# EAGLE board scanner_ps_nameco (EAGLE 5.11)
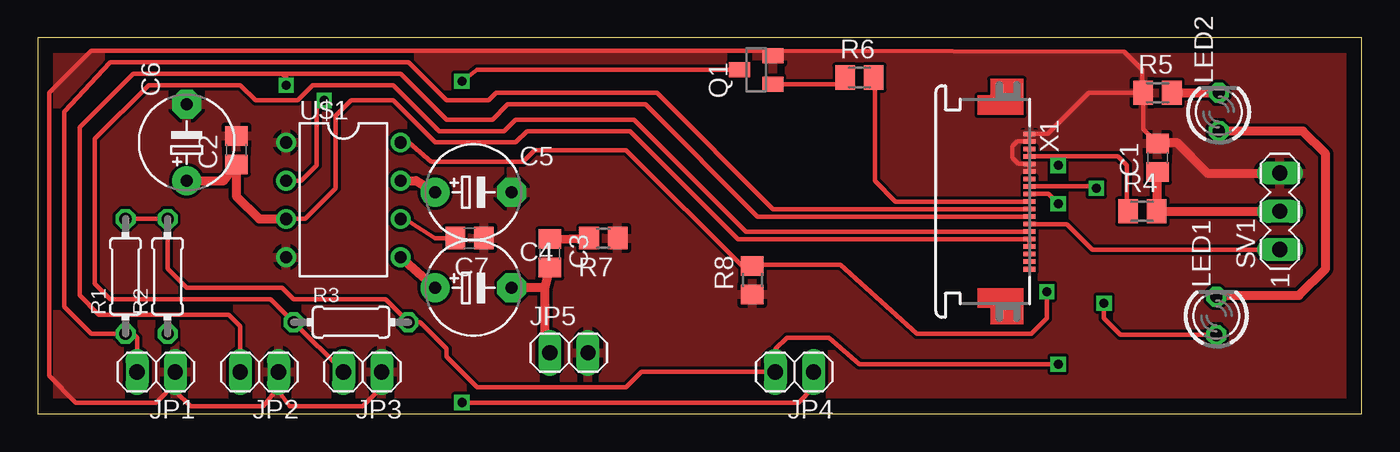
[diagram p0: board, top side]
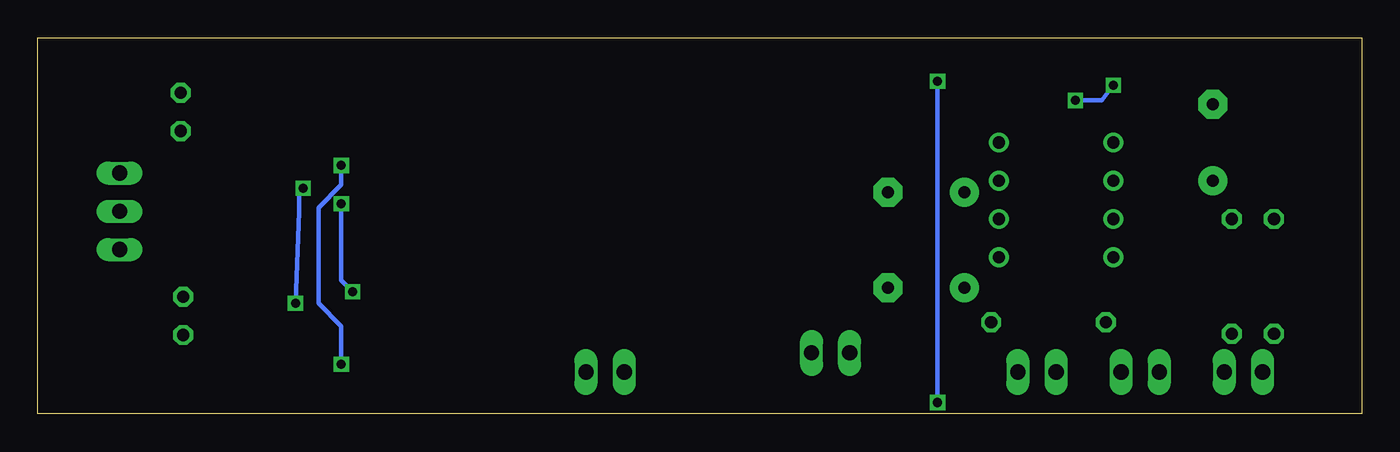
[diagram p1: board, bottom side, seen from below]

Size 88 x 25 mm. Coordinates in mm from the lower left corner, seen from the top.
Outline: 0,0 88,0 88,25 0,25 0,0
Copper layers (1*16): Top 0.035mm / dielectric 1.5mm / Bottom 0.035mm
Design rules "default": minimum track width 10mil, minimum drill 24mil, track to track 8mil, track to pad 8mil, pad to pad 8mil, via to via 8mil, smd to smd 8mil, copper to edge 40mil, drill to drill 8mil, minimum pad ring 10mil, minimum via ring 8mil, stop-mask expansion 4mil, vias tented up to drill 0mil, thermal gap 10mil

## Footprints (pad centres in the part's own frame; a part is rotated, then mirrored left to right if it is on the bottom)
C0805 = smd 1.3 x 1.5: 1 -0.95,0; 2 0.95,0
E5-6 = drill 0.813 pad 1.905 round: + -2.54,0 | drill 0.813 pad 1.905 octagon: - 2.54,0
1X02 = drill 1.016 long: 1 -1.27,0; 2 1.27,0
LED3MM = drill 0.813 octagon: A -1.27,0; K 1.27,0
SOT23 = smd 1 x 1.4: 1 -0.95,-1.1; 2 0.95,-1.1; 3 0,1.1
0204/7 = drill 0.813 octagon: 1 -3.81,0; 2 3.81,0
M0805 = smd 1.3 x 1.6: 1 -0.95,0; 2 0.95,0
R0805 = smd 1.3 x 1.5: 1 -0.95,0; 2 0.95,0
MA03-1 = drill 1.016 long: 1 -2.54,0; 2 0,0; 3 2.54,0
DIL08 = drill 0.813 pad 1.27 round: 1 -3.81,-3.81; 2 -1.27,-3.81; 3 1.27,-3.81; 4 3.81,-3.81; 5 3.81,3.81; 6 1.27,3.81; 7 -1.27,3.81; 8 -3.81,3.81
52746-19 = smd 0.3 x 0.8: 1 -4.5,0.6; 2 -4,0.6; 3 -3.5,0.6; 4 -3,0.6; 5 -2.5,0.6; 6 -2,0.6; 7 -1.5,0.6; 8 -1,0.6; 9 -0.5,0.6; 10 0,0.6; 11 0.5,0.6; 12 1,0.6; 13 1.5,0.6; 14 2,0.6; 15 2.5,0.6; 16 3,0.6; 17 3.5,0.6; 18 4,0.6; 19 4.5,0.6

## Placement (x,y rotation side)
C1  0.47µ  [C0805]  74.42,17.02 90 top
C2  100n  [C0805]  13.21,17.53 90 top
C3  100n  [C0805]  34.04,10.67 270 top
C4  470µ  [E5-6]  28.96,8.38 0 top
C5  100µ  [E5-6]  28.96,14.73 0 top
C6  220µ  [E5-6]  9.91,18.03 90 top
C7  22n  [C0805]  28.7,11.68 180 top
JP1  key1  [1X02]  7.87,2.79 180 top
JP2  key2  [1X02]  14.73,2.79 180 top
JP3  trigger  [1X02]  21.59,2.79 180 top
JP4  Laserdiode  [1X02]  50.29,2.79 180 top
JP5  speaker  [1X02]  35.31,4.06 0 top
LED1  YELLOW  [LED3MM]  78.33,6.52 90 top
LED2  RED  [LED3MM]  78.49,20.06 90 top
Q1  BSS123  [SOT23]  47.75,22.86 90 top
R1  10k  [0204/7]  5.84,9.14 90 top
R2  10k  [0204/7]  8.64,9.14 90 top
R3  10k  [0204/7]  20.83,6.1 0 top
R4  100  [M0805]  73.41,13.46 0 top
R5  120  [M0805]  74.42,21.34 0 top
R6  100  [M0805]  54.61,22.35 0 top
R7  4k7  [R0805]  37.59,11.68 180 top
R8  10k  [R0805]  47.5,8.89 90 top
SV1  TSOP_IR_REC  [MA03-1]  82.55,13.46 90 top
U$1  TDA7233  [DIL08]  20.32,14.22 270 top
X1  52746-19  [52746-19]  65.31,14.11 270 top

## Library data of the parts
C1-C7 R1-R8 = rcl
JP1-JP5 = pinhead
LED1 LED2 = led
Q1 = transistor-small-signal
SV1 = con-lstb
U$1 = Labor
X1 = con-molex

## Nets
GND: C1.2 C2.2 C5.- C6.- C7.1 JP1.1 JP2.1 JP3.1 JP5.2 Q1.2 R5.1 R7.1 R8.1 SV1.3 U$1.1 U$1.4 X1.1 X1.2 X1.5 X1.6
N$1: LED1.K LED2.A
N$2: LED2.K R5.2
N$3: C1.1 R4.2 SV1.2
N$4: Q1.1 R6.1
N$5: JP4.1 Q1.3
N$7: C3.2 C4.- JP5.1
N$8: C3.1 R7.2
N$9: C4.+ U$1.5
N$10: C5.+ U$1.7
N$11: C7.2 U$1.6
RGB_LED_B: X1.19
RGB_LED_G: X1.18
RGB_LED_R: X1.17
S_IR: X1.7
S_KEY1: JP1.2 R1.1 X1.11
S_KEY2: JP2.2 R2.1 U$1.2 X1.12
S_LASER: R6.2 X1.10
S_LED: LED1.A X1.8
S_SOUND: R8.2 U$1.8 X1.9
S_TRIGGER: JP3.2 R3.1 X1.14
S_USART: SV1.1 X1.13
VDD3.3V: JP4.2 R1.2 R2.2 R3.2 R4.1 X1.3 X1.4
VDD12V: C2.1 C6.+ U$1.3 X1.15 X1.16

## Tracks (layer width: path | path; a pad name or v marks a point on that pad's centre or on a via)
GND
  Top 0.305: X1.6 X1.5 65.17,16.61 64.77,17.02 64.77,17.78 65.1,18.11 X1.2 X1.1 67.13,18.61 69.85,21.34 R5.1 | R5.1 73.47,18.92 C1.2 | 49.15,23.75 49.53,24.13 72.2,24.06 73.41,22.86 73.41,21.4 R5.1 | 49.15,23.75 48.96,23.56 | JP3.1 22.86,1.78 21.59,0.51 16.76,0.51 16,1.52 JP2.1 16,1.78 14.99,0.51 10.16,0.51 9.14,1.52 JP1.1 9.14,2.03 7.87,0.76 2.54,0.76 0.76,2.54 0.76,21.34 3.56,24.13 48.53,24.13 Q1.2 49.09,23.81 49.15,23.75
  Top 0.61: SV1.3 77.72,16 75.69,18.03 74.49,18.03 C1.2
  pour Top: 0,24.89 0,0 88.14,0 88.14,24.89
N$1
  Top 0.61: LED2.A 84.08,18.79 85.6,17.27 85.6,9.65 83.82,7.87 78.41,7.87 LED1.K
N$2
  Top 0.61: R5.2 LED2.K
N$3
  Top 0.61: SV1.2 R4.2 74.42,13.53 C1.1
N$4
  Top 0.305: 53.47,22.16 R6.1 53.22,21.91 Q1.1
N$5  (via drill 0.6)
  Top 0.305: v28.19,0.76 50.55,0.76 51.56,1.78 JP4.1 | Q1.3 29.21,22.86 v28.19,22.1
  Bottom 0.305: v28.19,0.76 v28.19,22.1
N$7
  Top 0.61: 33.72,8.38 C4.- | 33.72,8.38 C3.2 | 33.72,8.38 33.72,4.38 JP5.1
N$8
  Top 0.61: C3.1 R7.2
N$9
  Top 0.61: C4.+ U$1.5
N$10
  Top 0.61: U$1.7 25.15,15.49 C5.+
N$11
  Top 0.305: U$1.6 24.38,12.95 26.42,11.68 C7.2
S_KEY1
  Top 0.305: JP1.2 6.6,5.08 6.35,5.33 R1.1 3.56,5.33 1.78,7.11 1.78,20.07 4.83,23.37 24.64,23.37 27.18,20.83 29.97,20.83 30.48,21.34 41.15,21.34 48.87,13.61 X1.11
S_KEY2  (via drill 0.6)
  Top 0.305: X1.12 47.85,13.11 40.39,20.57 31.24,20.57 30.23,19.56 27.18,19.56 24.13,22.61 16.26,22.61 | 16.26,22.61 6.35,22.61 2.79,19.05 2.79,7.87 4.06,6.6 8.64,6.6 | 8.64,6.6 12.7,6.6 13.46,5.84 JP2.2 | 8.64,6.6 R2.1 | U$1.2 17.53,15.49 18.54,16.51 18.54,20.32 v19.05,20.83 | v16.51,21.84 16.51,22.35 16.26,22.61
  Bottom 0.305: v19.05,20.83 17.27,20.83 v16.51,21.84
S_LASER
  Top 0.305: X1.10 57.01,14.11 55.63,15.49 55.63,22.29 R6.2
S_LED  (via drill 0.6)
  Top 0.305: LED1.A 71.97,5.25 70.87,6.35 v70.87,7.37 | X1.8 69.98,15.11 v70.36,14.99
  Bottom 0.305: v70.87,7.37 70.61,13.46 70.61,14.73 v70.36,14.99
S_SOUND  (via drill 0.6)
  Top 0.305: U$1.8 24.64,18.03 26.16,16.76 32.26,16.76 33.02,17.53 39.12,17.53 46.99,9.65 47.31,9.65 R8.2 47.56,9.91 53.34,9.91 58.42,5.33 66.04,5.33 67.06,6.35 v67.06,8.13 | X1.9 67.17,14.61 v67.82,13.97
  Bottom 0.305: v67.82,13.97 67.82,8.89 v67.06,8.13
S_TRIGGER
  Top 0.305: JP3.2 R3.1 15.49,7.62 4.83,7.62 3.81,8.64 3.81,18.29 7.37,21.84 13.46,21.84 14.48,20.83 17.27,20.83 18.29,21.84 23.62,21.84 26.67,18.8 30.99,18.8 31.75,19.56 39.62,19.56 47.07,12.11 X1.14
S_USART
  Top 0.305: X1.13 68.41,12.61 70.1,10.92 SV1.1
VDD3.3V  (via drill 0.6)
  Top 0.305: X1.4 X1.3 | R1.2 R2.2 8.64,9.65 9.91,8.38 16.26,8.38 17.02,7.62 23.11,7.62 R3.2 25.4,6.1 27.18,4.32 27.18,3.81 29.21,1.78 39.12,1.78 40.13,2.79 JP4.2 49.02,4.32 49.78,5.08 52.58,5.08 54.61,3.3 v67.82,3.3 | X1.4 71.79,17.11 72.39,16.51 72.39,13.53 R4.1 | X1.4 67.72,17.11 67.82,17.02 v67.82,16.51
  Bottom 0.305: v67.82,3.3 67.82,5.84 69.34,7.37 69.34,13.72 67.82,15.24 v67.82,16.51
VDD12V
  Top 0.305: X1.16 X1.15 46.55,11.61 39.37,18.8 32.51,18.8 31.75,18.03 26.42,18.03 23.62,20.83 20.83,20.83 19.81,19.81 19.81,14.99 17.78,12.95 U$1.3
  Top 0.61: C6.+ 12.38,15.49 C2.1 13.21,14.48 14.73,12.95 U$1.3